# Altium PCB PCB_Prototype.PcbDoc (part 1 of 2)
Units mil, origin at the board's own origin, x right, y up, seen from the top; angles counter-clockwise.
Board outline 3779.53 x 2992.13 mil, 2 copper layers (Top Layer, Bottom Layer), stack 12.8 mil thick; 97 components, 82 nets, 386 pads, 139 vias.
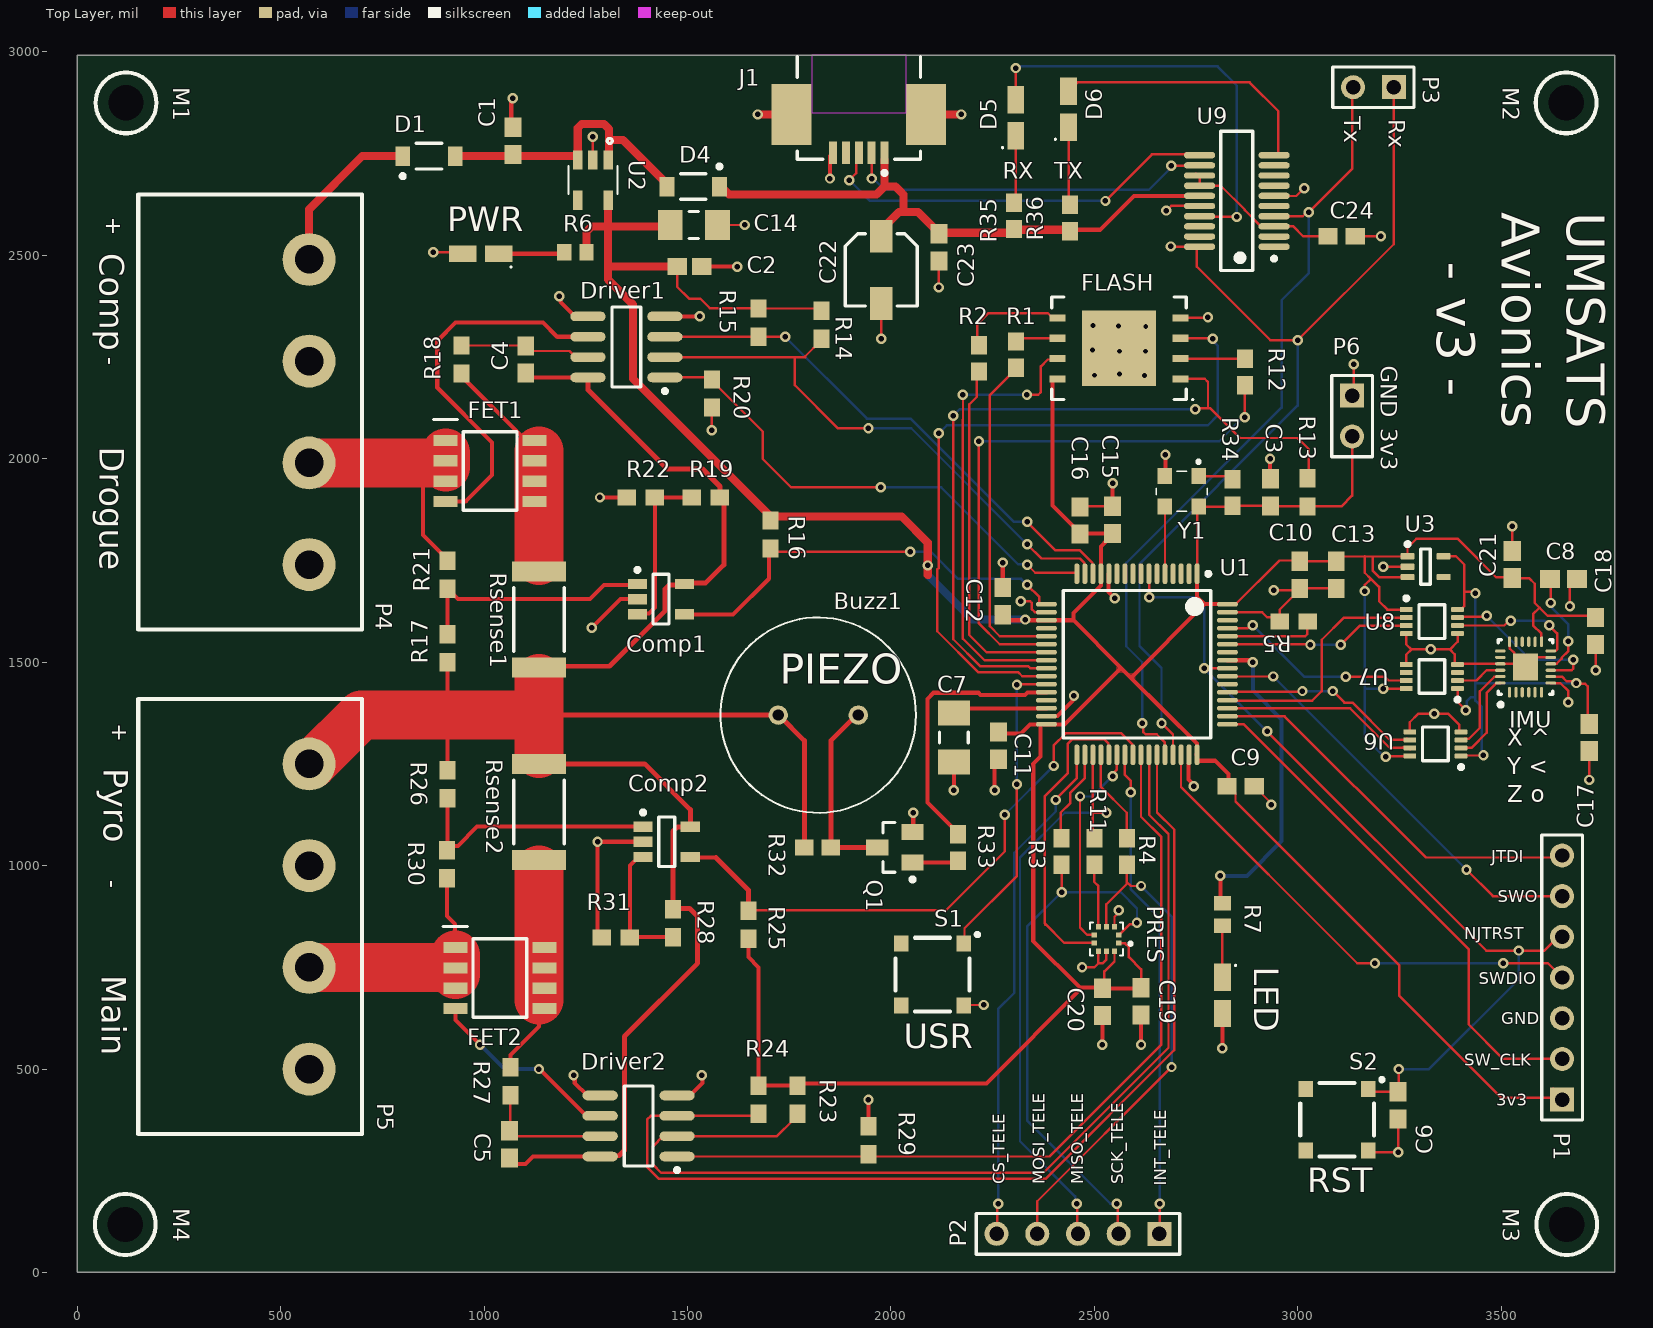
[diagram p0: Top Layer view]
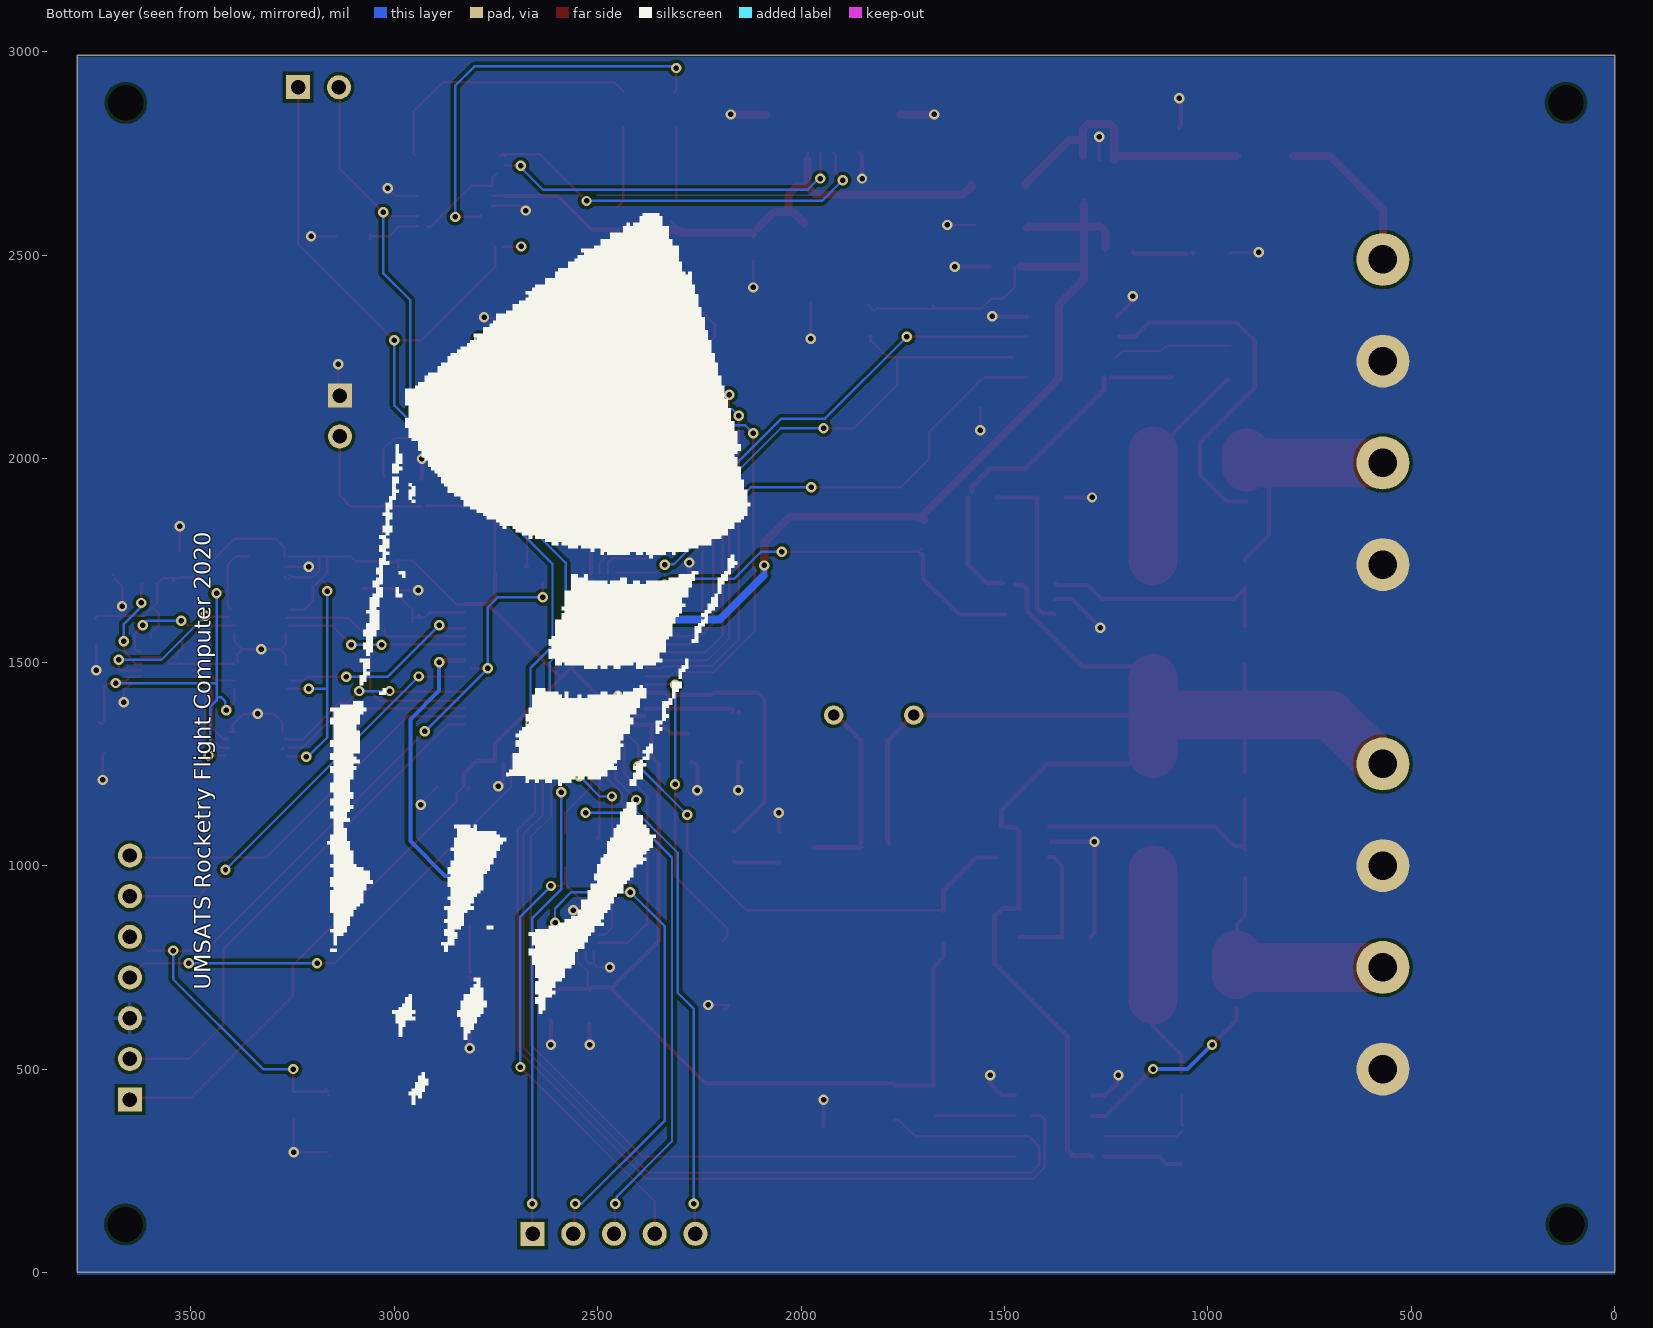
[diagram p1: Bottom Layer view, seen from below]
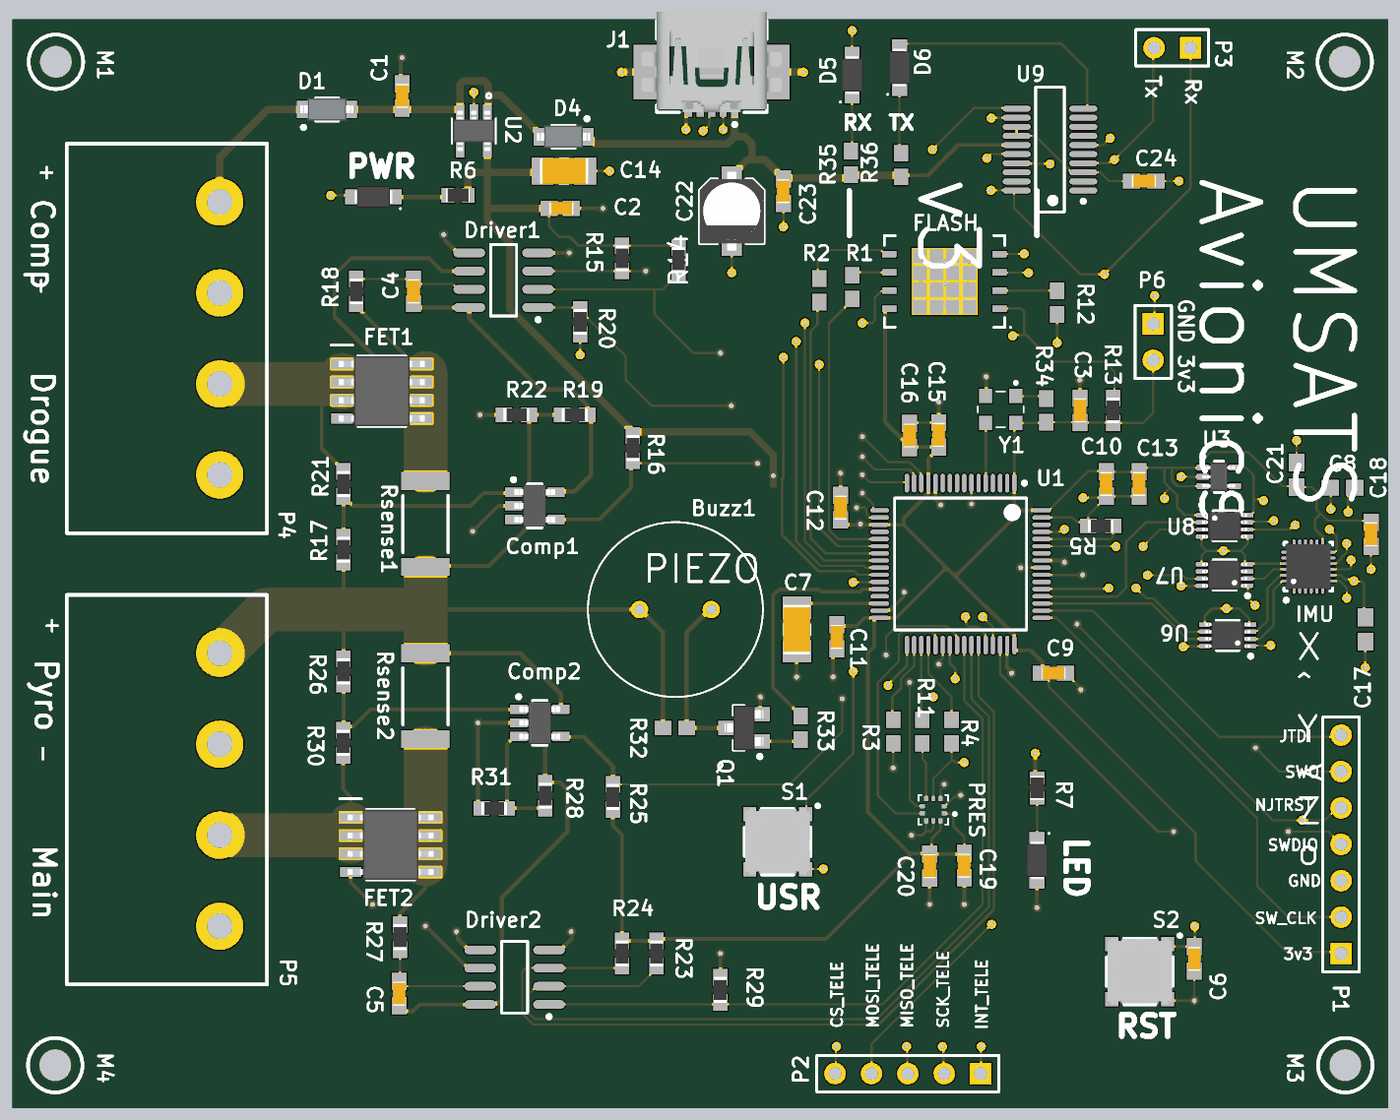
[diagram p3: 3D render of the assembled board from above, using the file's embedded part models]

## Layer stack, top to bottom
Top Solder: solder mask 0.4, Solder Resist, Dk 3.5
Top Layer: signal copper 1.4
Dielectric 1: dielectric 10, FR-4, Dk 4.2
Bottom Layer: signal copper 1.4
Bottom Solder: solder mask 0.4, Solder Resist, Dk 3.5

## Board outline
0,0 3779.53,0 3779.53,2992.13 0,2992.13

## Design rules (kind name [scope] priority, off if disabled: settings)
AcuteAngle [All] p1: minimum=8.50000000000000E+0001 checktracksonly=FALSE
Clearance [All] p1: gap=8 ignorepadtopadclearanceinfootprint=TRUE
HoleSize [All] p1: absolutevalues=TRUE maxlimit=248.03 minlimit=7.87 maxpercent=80.000 minpercent=20.000
MinimumAnnularRing [All] p1: minimumring=6
MinimumSolderMaskSliver MinimumSolderMaskSliver_Pads [InPadClass('All Pads') vs InPadClass('All Pads')] p1: minsoldermaskwidth=7.87
MinimumSolderMaskSliver MinimumSolderMaskSliver_1 [All] p2: minsoldermaskwidth=10
PolygonConnect [All] p1: connectstyle=Direct reliefconductorwidth=10 reliefentries=4 polygonreliefangle="90 Angle" airgapwidth=10
RoutingVias [All] p1: holewidth=13.5 width=25.5 viastyle="Through Hole" minholewidth=10 minwidth=24 maxholewidth=20 maxwidth=30
SilkToSolderMaskClearance [IsPad] p1: minsilkscreentomaskgap=6 clearancetoexposedcopper=TRUE
SolderMaskExpansion [All] p1: expansion=4
UnRoutedNet [All] p1: checkbadconnections=TRUE
Width Width_Recovery [(InNet('NetFET1_1') Or  InNet('NetFET1_5') OR InNet('NetC22_1'))] p1: maxlimit=120 minlimit=6 preferedwidth=10 bottomlayer_maxwidth=10 minimp=50.000000 maximp=50.000000 favimp=50.000000
Width [All] p2: maxlimit=120 minlimit=6 preferedwidth=10
Width Width_Power [(InNet('3.3V') OR InNet('GND'))] p3: maxlimit=19.68 minlimit=10 preferedwidth=19.68 minimp=50.000000 maximp=50.000000 favimp=50.000000
26 further rules are at their usual default settings.

## Classes and differential pairs
component class UART-to-USB: C22 C23 C24 D5 D6 J1 R35 R36 U9
component class Misc: Buzz1 C1 C2 C3 C20 D1 D4 FLASH Q1 R12 R13 R32 R33 R34 U2 Y1
component class Sensors: C8 C17 C18 C19 C21 IMU PRES R11 U3 U6 U7 U8
component class Recovery: C4 C5 Comp1 Comp2 Driver1 Driver2 FET1 FET2 P4 P5 R14 R15 R16 R17 R18 R19 R20 R21 R22 R23 R24 R25 R26 R27 R28 R29 R30 R31 Rsense1 Rsense2
component class Controller: C6 C7 C9 C10 C11 C12 C13 C14 C15 C16 LED M1 M2 M3 M4 P1 P2 P3 P6 PWR R1 R2 R3 R4 R5 R6 R7 S1 S2 U1

## Components (designator, comment, footprint, x,y, rotation, side; value= is the part's Value field where it differs from the comment)
Buzz1 "PS1240P02BT" *PS1240P02BT_PS1240P02BT(Primary) 1821.57,1370 r0 top
C1 "CAP 1 uF" CL10A105KB8NNNC#1 1070.87,2781.5 r90 top
C2 "CAP 1 uF" CL10A105KB8NNNC#2 1508.42,2472.44 r0 top
C3 "CAP 10 nF" 06035C104KAT4A 2933.07,1917.32 r270 top
C4 "CAP 0.1 uF" 06035C104KAT4A 1102.36,2244.09 r90 top
C5 "CAP 0.1 uF" 06035C104KAT4A 1062.99,314.96 r90 top
C6 "CAP 100 nF" 06035C104KAT4A 3246.81,410.55 r270 top
C7 "CAP 4.7uF (Low ESR)" CGA5L1X7R1E475K160AC 2155,1315 r270 top
C8 "100 nF" CAPC1608X90X35ML15T15 3653.54,1704.72 r0 top
C9 "CAP 100 nF" 06035C104KAT4A 2860,1195 r0 top
C10 "CAP 100 nF" 06035C104KAT4A 3005,1715 r270 top
C11 "CAP 100 nF" 06035C104KAT4A 2265,1295 r270 top
C12 "CAP 100 nF" 06035C104KAT4A 2275,1650 r90 top
C13 "CAP 100 nF" 06035C104KAT4A 3095,1715 r270 top
C14 "CAP 10uF" CL31A106KAHNFNE 1515.75,2574.8 r180 top value=10uF
C15 "CAP 1 uF" CL10A105KB8NNNC#1 2545,1850 r90 top
C16 "CAP 100 nF" 06035C104KAT4A 2464.57,1848.43 r90 top
C17 "100 nF" CAPC1608X90X35ML15T15 3716.54,1314.96 r90 top
C18 "CAP 100 nF" 06035C104KAT4A 3732.28,1576.77 r270 top
C19 "CAP 100 nF" 06035C104KAT4A 2615,666.54 r270 top
C20 "CAP 100 nF" 06035C104KAT4A 2520,665 r270 top
C21 "100 nF" CAPC1608X90X35ML15T15 3527.56,1740.16 r270 top
C22 "EEE-1CA100SR" PNSC-EEE1CA100SR_L 1976.38,2464.57 r270 top
C23 "CAP 100 nF" 06035C104KAT4A 2118.11,2519.68 r270 top
C24 "CAP 100 nF" 06035C104KAT4A 3108.27,2547.24 r0 top
Comp1 "TL331IDBVR" DBV0005A_M 1435,1655 r0 top
Comp2 "TL331IDBVR" DBV0005A_M 1449.06,1058.7 r0 top
D1 "MBR0520L" ON_Semi_CASE_425_0 864.67,2744.09 r0 top
D4 "MBR0520L" ON_Semi_CASE_425_0 1514.27,2669.29 r180 top
D5 "GREEN" "Vishay VLMx20 Low Current Mini SMD LED" 2307.09,2838.58 r90 top
D6 "RED" "Vishay VLMx20 Low Current Mini SMD LED" 2437.01,2859.25 r90 top
Driver1 "LTC1154HS8#PBF" LT-S8-8_N 1350,2275 r180 top
Driver2 "LTC1154HS8#PBF" LT-S8-8_N 1380,360 r180 top
FET1 "IRF7805ZTRPBF" SOIC127P600X165-8N 1015,1970 r0 top
FET2 "IRF7805ZTRPBF" SOIC127P600X165-8N 1039.06,723.7 r0 top
FLASH "MX25L25735FZ2I-10G" SON127P800X80_HS-9N 2560.83,2271.46 r180 top
IMU "ICM-20948" TDK-QFN-24_L 3560.04,1488.19 r90 top
J1 "UX60SC-MB-5ST(80)" HIRO-UX60SC-MB-5ST(80)_V 1921.26,2751.97 r180 top
LED "LED" "Vishay VLMx20 Low Current Mini SMD LED" 2814.96,681.1 r270 top
M1 "Mounting Hole M2" "Mounting Hole M2" 120,2875 r0 top
M2 "Mounting Hole M2" "Mounting Hole M2" 3660,2875 r0 top
M3 "Mounting Hole M2" "Mounting Hole M2" 3661.42,118.11 r0 top
M4 "Mounting Hole M2" "Mounting Hole M2" 118.11,118.11 r0 top
P1 "SWD/JTAG" HDR1X7 3650,425 r90 top
P2 "TELE_SPI" HDR1X5 2660,95 r180 top
P3 "UART" HDR1X2 3236.22,2913.39 r180 top
P4 "Header 5" BarrierBlock 570,1740 r180 top
P5 "Header 5" BarrierBlock 570,500 r180 top
P6 "Output" HDR1X2 3133.86,2155.12 r270 top
PRES "BMP388" *PQFN50P200X200X80-10N 2530,820 r180 top
PWR "LED" "Vishay VLMx20 Low Current Mini SMD LED" 992.13,2503.94 r180 top
Q1 "MMBT3904" FAIR-SOT23-3_V 2010,1045 r180 top
R1 "0R" CR0603-J/-000ELF 2307.09,2255.91 r270 top value=1K
R2 "0R" CR0603-J/-000ELF 2216.54,2247.05 r270 top value=1K
R3 "0R" CR0603-J/-000ELF 2420,1035 r270 top value=1K
R4 "0R" CR0603-J/-000ELF 2580,1035 r270 top value=1K
R5 "10K" RK73H1JTTD1002F 2990,1600 r180 top value=1K
R6 "750R" CRCW0603750RFKEA 1224.41,2507.87 r0 top value=1K
R7 "750R" CRCW0603750RFKEA 2815,880 r90 top value=1K
R11 "0R" CR0603-J/-000ELF 2500,1035 r270 top value=1K
R12 "0R" CR0603-J/-000ELF 2870.08,2213.58 r270 top value=1K
R13 "10K" RK73H1JTTD1002F 3023.62,1917.32 r270 top value=1K
R14 "10K" RK73H1JTTD1002F 1830,2330 r90 top value=1K
R15 "51k" RK73H1JTTD1002F 1675,2335 r90 top value=1K
R16 "10K" RK73H1JTTD1002F 1704.72,1813.98 r90 top value=1K
R17 "10k" RK73H1JTTD1002F 910,1534.45 r270 top value=1K
R18 "10k" RK73H1JTTD1002F 944.88,2244.09 r90 top value=1K
R19 "10K" RK73H1JTTD1002F 1545,1905 r0 top value=1K
R20 "10K" RK73H1JTTD1002F 1560,2160.55 r90 top value=1K
R21 "10k" RK73H1JTTD1002F 910,1715 r270 top value=1K
R22 "12k" RK73H1JTTD1002F 1385,1905 r0 top value=1K
R23 "10K" RK73H1JTTD1002F 1770,425 r90 top value=1K
R24 "51k" RK73H1JTTD1002F 1675,425 r90 top value=1K
R25 "10K" RK73H1JTTD1002F 1650,855 r270 top value=1K
R26 "10k" RK73H1JTTD1002F 910,1200 r90 top value=1K
R27 "10k" RK73H1JTTD1002F 1065,470 r270 top value=1K
R28 "10K" RK73H1JTTD1002F 1464.06,858.7 r90 top value=1K
R29 "10K" RK73H1JTTD1002F 1945,325 r270 top value=1K
R30 "10k" RK73H1JTTD1002F 909.06,1003.7 r90 top value=1K
R31 "12k" RK73H1JTTD1002F 1324.06,823.7 r0 top value=1K
R32 "1k" CR0603-J/-000ELF 1820,1045 r180 top value=1K
R33 "330" CR0603-J/-000ELF 2165,1045 r270 top value=1K
R34 "0R" CR0603-J/-000ELF 2840,1917.52 r270 top value=1K
R35 "1K" CR0603-J/-000ELF 2303.15,2597.44 r270 top
R36 "1K" CR0603-J/-000ELF 2440.94,2591.54 r270 top
Rsense1 "0.033 1% 2512(6432)" RESC2512(6432)_N 1135,1605 r270 top value="8660000.00 Ohm"
Rsense2 "0.033 1% 2512(6432)" RESC2512(6432)_N 1135,1131.89 r90 top value="8660000.00 Ohm"
S1 "SW-PB" PTS530GG065SMTRLFS 2102.36,732.28 r270 top
S2 "SW-PB" PTS530GG065SMTRLFS 3096.81,375.55 r270 top
U1 "STM32F401RET6" STM-LQFP64_N 2605,1495 r270 top
U2 "TLV75533PDBVR" SOT95P280X145-5N 1267.72,2685.04 r270 top
U3 "TLV70018DCKR" DCK0005A_N 3314.29,1735 r0 top
U6 "SN74LVC2T45DCTR" DCU0008A_N 3338.58,1299.21 r180 top
U7 "SN74LVC2T45DCTR" DCU0008A_N 3330,1465 r180 top
U8 "SN74LVC2T45DCTR" DCU0008A_N 3330,1600 r0 top
U9 "FT231XS-R" SSOP-20_L 2850.39,2633.86 r180 top
Y1 "ASEMB-8.000MHZ-XY-T" ASEMB 2715,1920 r180 top

## Footprints (in the part's own frame and the unit in brackets; to place one, negate y for a bottom-side part, rotate by r counter-clockwise, add the part's x,y. Pads: shape width x height; smd on the part's side, far side on the other; paste and mask are expansions set on the pad)
06035C104KAT4A [mm] "Low Density IPC Chip Capacitor 100nF 0603 50V 06035C104KAT4A"
  rect 1.2x1.05 smd: 1(-0.85,0) 2(0.85,0)
  body extent -0.85,-0.45 0.85,0.45, height 0.9
*PQFN50P200X200X80-10N [mm]
  rect 0.35x0.3 smd mask+0.05: 1(-0.765,0.25) 2(-0.765,-0.25) 6(0.765,-0.25) 7(0.765,0.25)
  rect 0.3x0.35 smd mask+0.05: 3(-0.5,-0.765) 4(0,-0.765) 5(0.5,-0.765) 8(0.5,0.765) 9(0,0.765) 10(-0.5,0.765)
  silkscreen extent -1.6,-1.03 1.03,1.03
*PS1240P02BT_PS1240P02BT(Primary) [mm]
  round 1.208 hole 0.7: P$1(-2.5,0) P$2(2.5,0)
  silkscreen extent -6.1,-6.1 6.1,6.1
ASEMB [mm]
  rect 0.9x1 smd: 1(-1.05,-0.95) 2(1.05,-0.95) 3(1.05,0.95) 4(-1.05,0.95)
  silkscreen extent -1.6,-1.95 1.6,1.25
BarrierBlock [mil]
  round 130 hole 70: 1(0,0) 2(0,-250) 3(0,-500) 4(0,-750)
  silkscreen extent -130,-910 420,160
CAPC1608X90X35ML15T15 [mm] "Chip Capacitor, 2-Leads, Body 1.60x0.81mm, IPC Low Density"
  rect 1.25x1.1 smd: 1(-0.85,0) 2(0.85,0)
  body extent -0.88,-0.48 0.87,0.48, height 0.9
CGA5L1X7R1E475K160AC [mm] "Low-Density IPC Chip Capacitor 4.7uF 25V 1206"
  rect 1.55x2 smd: 1(-1.525,0) 2(1.525,0)
  silkscreen extent -0.35,-0.9 0.35,0.9, body extent -1.75,-0.95 1.75,0.95, height 1.9
CL10A105KB8NNNC#1 [mm] "Low-Density IPC Chip Capacitor 1uF 50V 0603"
  rect 1.2x1.05 smd: 1(-0.85,0) 2(0.85,0)
  body extent -0.85,-0.45 0.85,0.45, height 0.9
CL10A105KB8NNNC#2 [mm] "Low-Density IPC Chip Capacitor 1uF 50V 0603"
  rect 1.2x1.05 smd: 1(-0.85,0) 2(0.686,0)
  body extent -0.85,-0.45 0.85,0.45, height 0.9
CL31A106KAHNFNE [mm] "Low-Density IPC Chip Capacitor 10uF 1206 CL31A106KAHNFNE"
  rect 1.55x1.9 smd: 1(-1.475,0) 2(1.475,0)
  silkscreen extent -0.3,-0.85 0.3,0.85, body extent -1.7,-0.9 1.7,0.9, height 1.8
CR0603-J/-000ELF [mm] "0R 0603 Resistor, IPCLow Density"
  rect 1.15x1 smd: 1(-0.825,0) 2(0.825,0)
  body extent -0.85,-0.45 0.85,0.45, height 0.55
CRCW0603750RFKEA [mm] "750R 0603 Resistor, IPC Low Density"
  rect 0.9x1.05 smd: 1(-0.7,0) 2(0.7,0)
  body extent -0.82,-0.48 0.82,0.48, height 0.5
DBV0005A_M [mm] "SOT23, 5-Leads, Body 3.05x1.75mm, Pitch 0.95mm, IPC Low Density"
  rect 1.2x0.65 smd: 1(-1.475,0.95) 2(-1.475,0) 3(-1.475,-0.95) 4(1.475,-0.95) 5(1.475,0.95)
  silkscreen extent -1.6,-1.55 0.5,1.95, body extent -1.42,-1.46 1.42,1.46, height 1.08
DCK0005A_N [mm] "SOT23, 5-Leads, Body 2.15x1.4mm, Pitch 0.65mm, IPC Medium Density"
  rrect25% 0.85x0.4 smd: 1(-1.125,0.65) 2(-1.125,0) 3(-1.125,-0.65) 4(1.125,-0.65) 5(1.125,0.65)
  silkscreen extent -1.25,-1.1 0.3,1.52, body extent -1.14,-1 1.14,1, height 0.94
DCU0008A_N [mm] "SOP, 8-Leads, Body 2.4x2.1mm, Pitch 0.5mm, IPC Medium Density"
  rrect33% 0.8x0.3 smd: 1(-1.6,0.75) 2(-1.6,0.25) 3(-1.6,-0.25) 4(-1.6,-0.75) 5(1.6,-0.75) 6(1.6,-0.25) 7(1.6,0.25) 8(1.6,0.75)
  silkscreen extent -1.73,-1.05 0.8,1.57, body extent -1.56,-1 1.56,1, height 0.9
FAIR-SOT23-3_V [mm] "SOT23, 3-Leads, Body 3.12x1.5mm, Pitch 0.95mm"
  rect 1.4x1 smd: 1(-1.1,0.95) 2(-1.1,-0.95) 3(1.1,0)
  silkscreen extent -1.23,-1.55 0.75,2.12, body extent -1.35,-1.56 1.35,1.56, height 1.2
HDR1X2 [mm] "Connector; Header; 2 Position"
  rect 1.5x1.5 hole 0.9: 1(0,0)
  round 1.5 hole 0.9: 2(2.54,0)
  silkscreen extent -1.27,-1.27 3.81,1.27
HDR1X5 [mm] "Connector; Header; 5 Position"
  rect 1.5x1.5 hole 0.9: 1(0,0)
  round 1.5 hole 0.9: 2(2.54,0) 3(5.08,0) 4(7.62,0) 5(10.16,0)
  silkscreen extent -1.27,-1.27 11.43,1.27
HDR1X7 [mm] "Connector; Header; 7 Position"
  rect 1.5x1.5 hole 0.9: 1(0,0)
  round 1.5 hole 0.9: 2(2.54,0) 3(5.08,0) 4(7.62,0) 5(10.16,0) 6(12.7,0) 7(15.24,0)
  silkscreen extent -1.27,-1.27 16.51,1.27
HIRO-UX60SC-MB-5ST(80)_V [mm] "SMD, 5-Leads, Body 7.7x7mm, Pitch 0.8mm"
  rect 0.5x1.4 smd: 1(-1.6,0) 2(-0.8,0) 3(0,0) 4(0.8,0) 5(1.6,0)
  rect 2.5x3.8 smd: 6(-4.2,-2.4) 7(4.2,-2.4)
  Top Layer keep-out region: -2.95,-6.1 2.95,-6.1 2.95,-2.5 -2.95,-2.5
  silkscreen extent -3.85,-6 3.85,1.37, body extent -4.9,-6.62 4.9,0.38, height 3.95
LT-S8-8_N [mm] "SOIC, 8-Leads, Body 5x4mm, Pitch 1.27mm, IPC Medium Density"
  oval 2.2x0.6 smd: 1(-2.4,1.905) 2(-2.4,0.635) 3(-2.4,-0.635) 4(-2.4,-1.905) 5(2.4,-1.905) 6(2.4,-0.635) 7(2.4,0.635) 8(2.4,1.905)
  silkscreen extent -2.53,-2.5 0.9,2.88, body extent -2,-2.5 2,2.5, height 1.76
"Mounting Hole M2" [mil]
  round 60 hole 86.61: 3(0,0)
  silkscreen extent -75,-75 75,75
ON_Semi_CASE_425_0 [mm]
  rect 0.915x1.22 smd paste+0 mask+0.076: 1(-1.638,0) 2(1.638,0)
  silkscreen extent -1.76,-1.37 0.8,0.8, body extent -2.19,-1 2.19,1, height 0.25
PNSC-EEE1CA100SR_L [mm] "Aluminum Electrolytic Capacitor, 2-Leads, Body 4.5x4.5mm, IPC High Density"
  rect 2.05x1.4 smd: 1(-2.1,0) 2(2.1,0)
  silkscreen extent -2.25,-2.25 2.25,2.25, body extent -2.75,-2.25 2.75,2.25, height 5.5
PTS530GG065SMTRLFS [mm] "Tactile Switch"
  rect 1x0.9 smd: 1(-1.925,1.95) 2(1.925,1.95) 3(-1.925,-1.95) 4(1.925,-1.95)
  silkscreen extent -2.6,-2.3 2.3,2.9, body extent -2.35,-2.25 2.3,2.26, height 0.64
RESC2512(6432)_N [mm] "Chip Resistor, Body 6.4x3.2mm, IPC Medium Density"
  rect 1.25x3.35 smd: 1(-3,0) 2(3,0)
  silkscreen extent -2,-1.57 2,1.58, body extent -3.25,-1.7 3.25,1.7, height 0.75
RK73H1JTTD1002F [mm] "10k 0603 Resistor IPC Low Density"
  rect 1.15x1 smd: 1(-0.875,0) 2(0.875,0)
  body extent -0.9,-0.45 0.9,0.45, height 0.55
SOIC127P600X165-8N [mm]
  rect 1.5x0.7 smd: 1(-2.775,1.905) 2(-2.775,0.635) 3(-2.775,-0.635) 4(-2.775,-1.905) 5(2.775,-1.905) 6(2.775,-0.635) 7(2.775,0.635) 8(2.775,1.905)
  silkscreen extent -3.53,-2.45 1.67,3.21, body extent -3,-2.45 3,2.45, height 1.65
SON127P800X80_HS-9N [mm] "SON, 8-Leads, Body 6.00x8.00mm, Pitch 1.27mm, Thermal Pad 4.70x4.60mm, IPC Medium Density"
  rect 1x0.45 smd: 1(-3.845,1.905) 2(-3.845,0.635) 3(-3.845,-0.635) 4(-3.845,-1.905) 5(3.845,-1.905) 6(3.845,-0.635) 7(3.845,0.635) 8(3.845,1.905)
  rect 4.6x4.7 smd paste-2.3: 9(0,0)
  silkscreen extent -4.65,-3.2 4.2,3.25, body extent -4.05,-3.05 4.05,3.05, height 0.8
SOT95P280X145-5N [mm]
  rect 1.21x0.59 smd: 1(-1.255,0.95) 2(-1.255,0) 3(-1.255,-0.95) 4(1.255,-0.95) 5(1.255,0.95)
  silkscreen extent -2.61,-1.53 0.88,1.53, body extent -1.4,-1.45 1.4,1.45, height 1.45
SSOP-20_L [mm] "SOP, 20-Leads, Body 8.6x3.9mm, Pitch 0.635mm, IPC High Density"
  oval 1.95x0.4 smd: 1(-2.325,2.857) 2(-2.325,2.222) 3(-2.325,1.587) 4(-2.325,0.952) 5(-2.325,0.317) 6(-2.325,-0.318) 7(-2.325,-0.953) 8(-2.325,-1.588) 9(-2.325,-2.223) 10(-2.325,-2.858) 11(2.325,-2.857) 12(2.325,-2.222) 13(2.325,-1.587) 14(2.325,-0.952) 15(2.325,-0.317) 16(2.325,0.318) 17(2.325,0.953) 18(2.325,1.588) 19(2.325,2.223) 20(2.325,2.858)
  silkscreen extent -2.45,-4.35 1,4.35, body extent -1.99,-4.37 1.99,4.37, height 1.76
STM-LQFP64_N [mm] "QFP, 64-Leads, Body 10x10mm, Pitch 0.5mm, IPC Medium Density"
  oval 1.3x0.3 smd: 1(-5.65,3.75) 2(-5.65,3.25) 3(-5.65,2.75) 4(-5.65,2.25) 5(-5.65,1.75) 6(-5.65,1.25) 7(-5.65,0.75) 8(-5.65,0.25) 9(-5.65,-0.25) 10(-5.65,-0.75) 11(-5.65,-1.25) 12(-5.65,-1.75) 13(-5.65,-2.25) 14(-5.65,-2.75) 15(-5.65,-3.25) 16(-5.65,-3.75) 33(5.65,-3.75) 34(5.65,-3.25) 35(5.65,-2.75) 36(5.65,-2.25) 37(5.65,-1.75) 38(5.65,-1.25) 39(5.65,-0.75) 40(5.65,-0.25) 41(5.65,0.25) 42(5.65,0.75) 43(5.65,1.25) 44(5.65,1.75) 45(5.65,2.25) 46(5.65,2.75) 47(5.65,3.25) 48(5.65,3.75)
  oval 0.3x1.3 smd: 17(-3.75,-5.65) 18(-3.25,-5.65) 19(-2.75,-5.65) 20(-2.25,-5.65) 21(-1.75,-5.65) 22(-1.25,-5.65) 23(-0.75,-5.65) 24(-0.25,-5.65) 25(0.25,-5.65) 26(0.75,-5.65) 27(1.25,-5.65) 28(1.75,-5.65) 29(2.25,-5.65) 30(2.75,-5.65) 31(3.25,-5.65) 32(3.75,-5.65) 49(3.75,5.65) 50(3.25,5.65) 51(2.75,5.65) 52(2.25,5.65) 53(1.75,5.65) 54(1.25,5.65) 55(0.75,5.65) 56(0.25,5.65) 57(-0.25,5.65) 58(-0.75,5.65) 59(-1.25,5.65) 60(-1.75,5.65) 61(-2.25,5.65) 62(-2.75,5.65) 63(-3.25,5.65) 64(-3.75,5.65)
  silkscreen extent -5.77,-4.6 4.6,4.6, body extent -5,-5 5,5, height 1.6
TDK-QFN-24_L [mm] "QFN, 24-Leads, Body 3.10x3.10mm, Pitch 0.40mm, Thermal Pad 1.70x1.54mm, IPC High Density"
  oval 0.65x0.2 smd: 1(-1.575,1) 2(-1.575,0.6) 3(-1.575,0.2) 4(-1.575,-0.2) 5(-1.575,-0.6) 6(-1.575,-1) 13(1.575,-1) 14(1.575,-0.6) 15(1.575,-0.2) 16(1.575,0.2) 17(1.575,0.6) 18(1.575,1)
  oval 0.2x0.65 smd: 7(-1,-1.575) 8(-0.6,-1.575) 9(-0.2,-1.575) 10(0.2,-1.575) 11(0.6,-1.575) 12(1,-1.575) 19(1,1.575) 20(0.6,1.575) 21(0.2,1.575) 22(-0.2,1.575) 23(-0.6,1.575) 24(-1,1.575)
  rect 1.7x1.54 smd: 25(0,0)
  silkscreen extent -2.47,-1.7 1.7,1.7, body extent -1.55,-1.55 1.55,1.55, height 1.05
"Vishay VLMx20 Low Current Mini SMD LED" [mm] "Molded Diode, 2-Leads, Body 2.20x1.40mm, IPC Low Density"
  rect 1.7x1.05 smd: 1(-1.125,0) 2(1.125,0)
  silkscreen extent -1.92,0.77 -1.83,0.87, body extent -1.37,-0.75 1.37,0.75, height 1.4

## Part data
Buzz1: "Audio Buzzer Piezo 30Vo-p 3Vo-p 70dBA Pin Through Hole T/R", Package="2020 TDK", Supplier Part Number 1=445-2525-1-ND, Availability=Unavailable, MF=TDK, MP=PS1240P02BT, Price=None, SnapEDA_Link=https://www.snapeda.com/parts/PS1240P02BT/TDK-Lambda%20Americas%20Inc/view-part/?ref=snap, Supplier 1=Digi-Key
C1 C2 C15: library part Cap, "Capacitor", Supplier Part Number 1=1276-1860-1-ND, LatestRevisionDate=17-Jul-2002, LatestRevisionNote="Re-released for DXP Platform.", Published=8-Jun-2000, Publisher="Altium Limited", Supplier 1=Digi-Key
C3: library part Cap, "Capacitor", Supplier Part Number 1=399-1091-1-ND, LatestRevisionDate=17-Jul-2002, LatestRevisionNote="Re-released for DXP Platform.", Published=8-Jun-2000, Publisher="Altium Limited", Supplier 1=Digi-Key
C4 C5 C6 C9 C10 C11 C12 C13 C16 C18 C19 C20 C23 C24: library part Cap, "Capacitor", Supplier Part Number 1=478-10346-1-ND, LatestRevisionDate=17-Jul-2002, LatestRevisionNote="Re-released for DXP Platform.", Published=8-Jun-2000, Publisher="Altium Limited", Supplier 1=Digi-Key
C7: library part Cap, "Capacitor", Supplier Part Number 1=445-5706-1-ND, LatestRevisionDate=17-Jul-2002, LatestRevisionNote="Re-released for DXP Platform.", Published=8-Jun-2000, Publisher="Altium Limited", Supplier 1=Digi-Key
C8 C17 C21: library part CMP-2006-04388-1, Manufacturer="AVX Interconnect / Elco", Part Number=06035C104K4Z2A, Supplier Part Number 1=478-10346-1-ND, Supplier 1=Digi-Key
C14: library part Cap, "Capacitor", Supplier Part Number 1=1276-3038-1-ND, LatestRevisionDate=17-Jul-2002, LatestRevisionNote="Re-released for DXP Platform.", PackageDescription="Radial Cap, Thru-Hole; 2 Leads; 0.3 in Pin Spacing", PackageReference=RAD-0.3, Published=8-Jun-2000, Publisher="Altium Limited", Supplier 1=Digi-Key
C22: library part CMP-2000-06199-1, "Aluminum Electrolytic Capacitor, 10 uF, +/- 20%, -40 to 85 degC, 2-Pin SMD, RoHS, Tape and Reel", AC Ripple Current=28mA, AE Capacitor Case=RadialCan-SMD, Capacitance=10µF, Capacitance Tolerance=±20%, Capacitor Mounting=SMD, Leakage Current=3µA, Life Time @ Temperature=2000hours@85°C, Manufacturer=Panasonic, Operating Life Temperature=85°C, Operating life Time=2000h, Operating Temperature Min=-40°C, Operating Temperature Range=-40°Cto+85°C, Package / Case=B, Package Description="2-Pin Surface Mount Device, Body 4.5 x 4.5 mm", Package Reference=EEE1CA100SR, Power Factor=0.16, Power Factor Frequency=120Hz, Supplier Part Number 1=PCE3878CT-ND, Tolerance +=20%, Voltage Rating=16V, Capacitance Tolerance ±=±20%, Capacitor Case Style=RadialCan-SMD, Capacitor Terminals=SMD, Datasheet URL=https://datasheet.ciiva.com/19458/1355487-19458346.pdf, Datasheet Version=04/2005, Diameter=4mm, External Depth=4.3mm, External Length / Height=5.4mm, External Width=4.3mm, Height=5.4mm, Lead Cross-section Width=0.65mm, Lead Length=1.8mm, Lead Spacing=1mm, Lifetime @ Temperature=2000hours@85°C, Manufacturer URL=http://www.panasonic.com/, Mounting Technology=SurfaceMount, No. of Pins=2, Operating Lifetime=2000h, Operating Temperature Max=85°C, Packaging=CutTape, Product Range=PANASONIC-SSeries, Ripple Current AC=28mA, Ripple Current Frequency=120Hz, Ripple Current Temperature=85°C, Series=VS, Supplier 1=Digi-Key, SVHC=NoSVHC(16-Dec-2013), Tape Width=12mm, Tolerance -=20%, Voltage Rating V DC=16V
Comp1 Comp2: library part CMP-2000-04959-1, "Single Differential Comparator, 2 to 36 V, -40 to 125 degC, 5-Pin SOT-23, Green (RoHS & no Sb/Br), Tape and Reel", Manufacturer=TexasInstruments, Maximum Dual Supply Voltage=±18V, Maximum Single Supply Voltage=36V, Minimum Dual Supply Voltage=±1V, Minimum Single Supply Voltage=2V, Operating Temperature=-40to85degC, Package=5SOT-23, Package Description="5-Pin Small Outline Transistor, Body 2.9 x 1.6 mm, Pitch 0.95 mm", Package Reference=DBV5, Package Version="4073253-4/N, 12/2014", Supplier Part Number 1=296-37702-1-ND, Typical Voltage Gain=106.02dB, Category=Comparator, Datasheet URL=http://www.ti.com/general/docs/lit/getliterature.tsp?genericPartNumber=TL331&fileType=pdf, Datasheet Version="Rev. G, 02/2016", Manufacturer URL=http://www.ti.com/, Mounting=SurfaceMount, Number of Channels per Chip=1, Output Type=OpenCollector, Package URL=http://www.ti.com/lit/ml/mpds018l/mpds018l.pdf, Packaging=Tape&Reel, Rad Hard=No, Rail to Rail=No, Strobe Capability=No, Supplier 1=Digi-Key, Typical Response Time=1.3us
D1 D4: "Schottky Diode", Average Rectified Current=500mA, Capacitance=4pF, Current Rating=500A, Forward Voltage=385mV, Manufacturer="ON Semiconductor / Fairchild", Max Forward Surge Current (Ifsm)=5.5A, Max Operating Temperature=125°C, Max Repetitive Reverse Voltage (Vrrm)=20V, Max Reverse Leakage Current=250uA, Min Operating Temperature=-65°C, Package Quantity=3000, Power Dissipation=400mW, Supplier Part Number 1=MBR0520LCT-ND, ComponentLink1Description=http://www.farnell.com/datasheets/2304093.pdf?src-supplier=Farnell, ComponentLink1URL=http://www.farnell.com/datasheets/2304093.pdf?src-supplier=Farnell, ComponentLink2Description=http://www.mouser.com/ds/2/149/MBR0520L-67539.pdf?src-supplier=Mouser, ComponentLink2URL=http://www.mouser.com/ds/2/149/MBR0520L-67539.pdf?src-supplier=Mouser, ComponentLink3Description=https://www.fairchildsemi.com/datasheets/MB/MBR0520L.pdf?src-supplier=Digi-Key, ComponentLink3URL=https://www.fairchildsemi.com/datasheets/MB/MBR0520L.pdf?src-supplier=Digi-Key, ComponentLink4Description=https://www.fairchildsemi.com/datasheets/MB/MBR0520L.pdf?src-supplier=Avnet, ComponentLink4URL=https://www.fairchildsemi.com/datasheets/MB/MBR0520L.pdf?src-supplier=Avnet, ComponentLink5Description=http://www.fairchildsemi.com/ds/MB/MBR0520L.pdf?src-supplier=Avnet+Europe, ComponentLink5URL=http://www.fairchildsemi.com/ds/MB/MBR0520L.pdf?src-supplier=Avnet+Europe, ComponentLink6Description=http://www.jameco.com/Jameco/Products/ProdDS/871594.pdf?src-supplier=Jameco, ComponentLink6URL=http://www.jameco.com/Jameco/Products/ProdDS/871594.pdf?src-supplier=Jameco, ComponentLink7Description=http://www.fairchildsemi.com/ds/MB/MBR0520L.pdf?src-supplier=Future+Electronics, ComponentLink7URL=http://www.fairchildsemi.com/ds/MB/MBR0520L.pdf?src-supplier=Future+Electronics, ComponentLink8Description=http://www.farnell.com/datasheets/48015.pdf?src-supplier=Element14, ComponentLink8URL=http://www.farnell.com/datasheets/48015.pdf?src-supplier=Element14, Element Configuration=Single, Forward Current=500mA, Height=1.03mm, Lead Free="Lead Free", Length=2.7mm, Manufacturer Part Number=MBR0520L, Max Reverse Voltage (DC)=20V, Max Surge Current=5.5A, Mount="Surface Mount", Number of Pins=2, Output Current=500mA, Packaging="Tape and Reel", Peak Non-Repetitive Surge Current=5.5A, Peak Reverse Current=250uA, Polarity=Standard, Radiation Hardening=No, REACH SVHC="No SVHC", RoHS=Yes, Supplier 1=Digi-Key, Voltage Rating (DC)=20V, Weight=0.03g, Width=1.6mm
D5: library part LED2, "Typical RED, GREEN, YELLOW, AMBER GaAs LED", Supplier Part Number 1=67-2282-1-ND, LatestRevisionDate=17-Jul-2002, LatestRevisionNote="Re-released for DXP Platform.", PackageDescription="SM LED; 2 Flat Leads", PackageReference=3.2X1.6X1.1, PackageVersion=Feb-2002, Published=8-Jun-2000, Publisher="Altium Limited", Supplier 1=Digi-Key
D6 LED PWR: library part LED2, "Typical RED, GREEN, YELLOW, AMBER GaAs LED", Supplier Part Number 1=VLMS20J2L1-GS08CT-ND, LatestRevisionDate=17-Jul-2002, LatestRevisionNote="Re-released for DXP Platform.", PackageDescription="SM LED; 2 Flat Leads", PackageReference=3.2X1.6X1.1, PackageVersion=Feb-2002, Published=8-Jun-2000, Publisher="Altium Limited", Supplier 1=Digi-Key
Driver1 Driver2: library part CMP-0479-00484-1, "High-Side Micropower MOSFET Driver, 22 V Vin MAX, 8-pin SOIC (S8-8), -40 to 150 degC, Pb-Free", Manufacturer="Linear Technology", Supplier Part Number 1=LTC1154HS8#PBF-ND, ComponentLink1Description="Manufacturer URL", ComponentLink1URL=http://www.linear.com/, ComponentLink2Description=Datasheet, ComponentLink2URL=http://cds.linear.com/docs/en/datasheet/1154fb.pdf, ComponentLink3Description="Package Specification", ComponentLink3URL=http://cds.linear.com/docs/en/packaging/05081610_G_SO8.pdf, DatasheetVersion="Rev. B", Mounting Technology="Surface Mount", PackageDescription="8-Pin Plastic Small Outline (Narrow .150 Inch), Body 4.9 x 3.9 mm, Pitch 1.27 mm", PackageReference=S8-8, PackageVersion="Rev. G, 03/2012", PartNumber=LTC1154HS8#PBF, RoHS=TRUE, Supplier 1=Digi-Key
FET1 FET2: library part RSS100N03FRATB, "MOSFET (N-Channel)", Manufacturer_Name="ROHM Semiconductor", Mouser Part Number=755-RSS100N03FRATB, Supplier Part Number 1=IRF7805ZPBFCT-ND, Datasheet Link=https://componentsearchengine.com/Datasheets/1/RSS100N03FRATB.pdf, Height=1.65mm, Manufacturer_Part_Number=RSS100N03FRATB, Mouser Price/Stock=https://www.mouser.com/Search/Refine.aspx?Keyword=755-RSS100N03FRATB, Supplier 1=Digi-Key
FLASH: library part S25FL064P, "MX25L25735F 256 Mb Flash Memory", Supplier Part Number 1=1092-1152-ND, Supplier 1=Digi-Key
IMU: library part CMP-2000-07532-1, "World’s Lowest Power 9-Axis MEMS MotionTracking(TM) Device, 1.71 to 3.6 V, -40 to 85 degC, 24-Pin QFN, RoHS, Tape and Reel", Manufacturer=TDK, Package Description="24-Pin Quad Flat No-lead Package, Body 3 x 3 mm, Pitch 0.4 mm", Package Reference=QFN-24, Supplier Part Number 1=1428-1123-1-ND, Datasheet URL=https://www.invensense.com/wp-content/uploads/2016/06/DS-000189-ICM-20948-v1.3.pdf, Datasheet Version="Rev. 1.3, 06/2017", Manufacturer URL=http://www.tdk.com/, Mounting Technology=SurfaceMount, Supplier 1=Digi-Key
J1: library part CMP-2000-07376-1, "Mini-B Connector, SMT Mount Receptacle Meeting Requirement of USB 2.0 Standard, 5 V, 1 A, -30 to 75 degC, 5-Pin SMD, RoHS, Tape and Reel", Current Rating (Max)=1A, Manufacturer="Hirose Electric", Operating Temperature Max Deg. C=75C, Operating Temperature Min Deg. C=-30C, Operating Temp Range=-30Cto75C, Package Description="5-Pin Surface Mount Device, Body 7.7 x 7 mm, Pitch 0.8 mm", Supplier Part Number 1=H11671CT-ND, Voltage Rating Max=5VAC, Body Orientation=RightAngle, Contact Material=CopperAlloy, Contact Plating=Gold, Datasheet URL=https://datasheet.ciiva.com/4598/e24000153-34949-4598883.pdf, Datasheet Version=04/2008, DELETED=Compliant, Gender=RCP, Housing Material=Synthetic, Manufacturer URL=https://www.hirose.com, Mounting Style=ThroughHole, Mounting Technology=SurfaceMount, Number of Contacts=5POS, Number of Ports=1Port, Number of Terminals=5, Package Reference=UX60SC-MB-5ST(80), Packaging=TapeandReel, Pitch (mm)=0.8mm, Product Depth (mm)=7mm, Product Diameter (mm)=NotRequiredmm, Product Height (mm)=3.95mm, Product Length (mm)=7.7mm, Supplier 1=Digi-Key, Termination Method=Solder, Type=Mini-USB
P1: library part "Header 7", "Header, 7-Pin", Supplier Part Number 1=S7040-ND, LatestRevisionDate=17-Jul-2002, LatestRevisionNote="Re-released for DXP Platform.", Publisher="Altium Limited", Supplier 1=Digi-Key
P2: library part "Header 5", "Header, 5-Pin", Supplier Part Number 1=S7038-ND, LatestRevisionDate=17-Jul-2002, LatestRevisionNote="Re-released for DXP Platform.", Publisher="Altium Limited", Supplier 1=Digi-Key
P3 P6: library part "Header 2", "Header, 2-Pin", Supplier Part Number 1=S7035-ND, LatestRevisionDate=17-Jul-2002, LatestRevisionNote="Re-released for DXP Platform.", Publisher="Altium Limited", Supplier 1=Digi-Key
P4 P5: library part "Header 4", "Header, 4-Pin", Supplier Part Number 1=A112373-ND, LatestRevisionDate=17-Jul-2002, LatestRevisionNote="Re-released for DXP Platform.", Publisher="Altium Limited", Supplier 1=Digi-Key
PRES: "P-Sensor SPI I2C 1, 25 Bar SMD", Package="WFLGA-10 Bosch Tools", Supplier Part Number 1=828-1079-1-ND, Availability=Unavailable, MF="Bosch Sensortec", MP=BMP388, Price=None, SnapEDA_Link=https://www.snapeda.com/parts/BMP388/Bosch%20Sensortec/view-part/?ref=snap, Supplier 1=Digi-Key
Q1: library part CMP-1670-00008-1, "NPN General Purpose Amplifier, 40 V, 0.2 A, -55 to 150 degC, 3-Pin SOT23, RoHS, Tape and Reel", Capacitance="1.8E-11 f", Frequency="12.288 MHz", Frequency Tolerance=30ppm, Load Capacitance="18 pF", Max Operating Temperature=70degC, Min Operating Temperature=-20degC, Package Quantity=1000, Supplier Part Number 1=MMBT3904TPMSCT-ND, ComponentLink1Description="Manufacturer URL", ComponentLink1URL=https://www.fairchildsemi.com/, ComponentLink2Description=Datasheet, ComponentLink2URL=https://www.fairchildsemi.com/datasheets/MM/MMBT3904.pdf, ComponentLink3Description="Package Specification", ComponentLink3URL=http://www.fairchildsemi.com/dwg/MA/MA03D.pdf, DatasheetVersion="Rev. 1.1.0, 10/2014", ESR="40 Ohm", Height="0.041 inch", Length="0.197 inch", Mount="Surface Mount", PackageDescription="3-Pin Small Outline Transistor, Body 2.92 x 1.325 mm, Pitch 0.95 mm", PackageReference=SOT23-3, Packaging="Tape and Reel", Pins=4, REACH SVHC="No SVHC", RoHSCompliant=True, Supplier 1=Digi-Key, Tolerance=30ppm, Width="0.126 inch"
R1 R2 R3 R4 R11 R12 R34: library part Res1, "Resistor", Supplier Part Number 1=CR0603-J/-000ELFDKR-ND, LatestRevisionDate=17-Jul-2002, LatestRevisionNote="Re-released for DXP Platform.", PackageDescription="Axial Device, Thru-Hole; 2 Leads; 0.3 in Pin Spacing", PackageReference=AXIAL-0.3, Published=8-Jun-2000, Publisher="Altium Limited", Supplier 1=Digi-Key
R5 R13 R14 R16 R17 R18 R19 R20 R21 R23 R25 R26 R27 R28 R29 R30: library part Res1, "Resistor", Supplier Part Number 1=2019-RK73H1JTTD1002FCT-ND, LatestRevisionDate=17-Jul-2002, LatestRevisionNote="Re-released for DXP Platform.", PackageDescription="Axial Device, Thru-Hole; 2 Leads; 0.3 in Pin Spacing", PackageReference=AXIAL-0.3, Published=8-Jun-2000, Publisher="Altium Limited", Supplier 1=Digi-Key
R6 R7: library part Res1, "Resistor", Supplier Part Number 1=541-750HCT-ND, LatestRevisionDate=17-Jul-2002, LatestRevisionNote="Re-released for DXP Platform.", PackageDescription="Axial Device, Thru-Hole; 2 Leads; 0.3 in Pin Spacing", PackageReference=AXIAL-0.3, Published=8-Jun-2000, Publisher="Altium Limited", Supplier 1=Digi-Key
R15 R24: library part Res1, "Resistor", Supplier Part Number 1=RMCF0603FT51K0CT-ND, LatestRevisionDate=17-Jul-2002, LatestRevisionNote="Re-released for DXP Platform.", PackageDescription="Axial Device, Thru-Hole; 2 Leads; 0.3 in Pin Spacing", PackageReference=AXIAL-0.3, Published=8-Jun-2000, Publisher="Altium Limited", Supplier 1=Digi-Key
R22 R31: library part Res1, "Resistor", Supplier Part Number 1=RMCF0603FT12K0CT-ND, LatestRevisionDate=17-Jul-2002, LatestRevisionNote="Re-released for DXP Platform.", PackageDescription="Axial Device, Thru-Hole; 2 Leads; 0.3 in Pin Spacing", PackageReference=AXIAL-0.3, Published=8-Jun-2000, Publisher="Altium Limited", Supplier 1=Digi-Key
R32 R35 R36: library part Res1, "Resistor", Supplier Part Number 1=RMCF0603FT1K00CT-ND, LatestRevisionDate=17-Jul-2002, LatestRevisionNote="Re-released for DXP Platform.", PackageDescription="Axial Device, Thru-Hole; 2 Leads; 0.3 in Pin Spacing", PackageReference=AXIAL-0.3, Published=8-Jun-2000, Publisher="Altium Limited", Supplier 1=Digi-Key
R33: library part Res1, "Resistor", Supplier Part Number 1=RMCF0603FT330RCT-ND, LatestRevisionDate=17-Jul-2002, LatestRevisionNote="Re-released for DXP Platform.", PackageDescription="Axial Device, Thru-Hole; 2 Leads; 0.3 in Pin Spacing", PackageReference=AXIAL-0.3, Published=8-Jun-2000, Publisher="Altium Limited", Supplier 1=Digi-Key
Rsense1 Rsense2: library part CMP-1018-00955-1, "8M66 1W 1% 2512 (6432 Metric)  SMD", Case-EIA=2512, Case-Metric=6432, Power="1 W", Supplier Part Number 1=YAG2162CT-ND, Tolerance="1 %", Supplier 1=Digi-Key, Technology=SMT
S1 S2: "Switch", Supplier Part Number 1=CKN10838CT-ND, LatestRevisionDate=17-Jul-2002, LatestRevisionNote="Re-released for DXP Platform.", PackageDescription="Switch; 2 Leads", PackageReference=SPST-2, Published=24-Mar-1999, Publisher="Altium Limited", Supplier 1=Digi-Key
U1: "ARM Cortex-M4 32-bit MCU+FPU, 512 KB Flash, 96 KB Internal RAM, 50 I/Os, 64-Pin LQFP, -40 to 85 degC, Tray", I/Os (High Current)=50, Operating Frequency(F) (Processor speed) (MHz)=84, Package Description=LQFP64, Package Reference="64-Pin Low-profile Quad Flat Package, Body 10 x 10 mm, Pitch 0.5 mm", Supplier Part Number 1=497-17429-ND, Supply Voltage(Vcc) min (V)=1.7, ComponentLink1Description="Manufacturer URL", ComponentLink1URL=http://www.st.com/, ComponentLink2Description=Datasheet, ComponentLink2URL=http://www.st.com/st-web-ui/static/active/en/resource/technical/document/datasheet/DM00102166.pdf, Core="ARM Cortex-M4", DatasheetVersion="Rev. 3", FLASH Size (Prog) (kB)=512, Internal RAM Size (kB)=96, Mounting Technology="Surface Mount", Packing=Tray, Supplier 1=Digi-Key
U2: "500mA Low-IQ Small-Size Low-Dropout _LDO_ Regulator 5-SOT-23 -40 to 125", Package="SOT-23 Texas Instruments", Supplier Part Number 1=296-50411-1-ND, Availability=Unavailable, MF="Texas Instruments", MP=TLV75533PDBVR, Price=None, SnapEDA_Link=https://www.snapeda.com/parts/TLV75533PDBVR/Texas%20Instruments/view-part/?ref=snap, Supplier 1=Digi-Key
U3: library part CMP-0394-00928-2, "Single Output LDO, 200 mA, Fixed 1.8 V Output, 2 to 5.5 V Input, with Low IQ, 5-pin SC70 (DCK), -40 to 125 degC, Green (RoHS & no Sb/Br)", Manufacturer="Texas Instruments", Supplier Part Number 1=296-32409-1-ND, Accuracy(%)=2, Code_JEDEC=MO-203, ComponentLink1Description="Manufacturer URL", ComponentLink1URL=http://www.ti.com/, ComponentLink2Description=Datasheet, ComponentLink2URL=http://www.ti.com/general/docs/lit/getliterature.tsp?genericPartNumber=TLV70018&fileType=pdf, ComponentLink3Description="Package Specification", ComponentLink3URL=http://www.ti.com/litv/pdf/mpds025f, DatasheetVersion=SLVSA00D, Eco-Plan="Green (RoHS & no Sb/Br)", Fixed Output Options(V)=1.8, Iout(Max)(A)=0.2, Iq(Typ)(mA)=0.03, Mounting Technology="Surface Mount", PackageDescription="5-Pin Plastic Small-Outline, Body 2 x 1.25 mm, Pitch 0.65 mm", PackageReference=DCK0005A, PackageVersion=4093553-3/G, PartNumber=TLV70018DCKR, SubFamily="Single Channel LDO", Supplier 1=Digi-Key, Vdo(Typ)(mV)=175, Vin(Max)(V)=5.5, Vin(Min)(V)=2, Vout Adj(Max)(V)=1.8, Vout Adj(Min)(V)=1.8
U6 U7 U8: library part CMP-0859-00011-4, "Dual-Bit Dual Supply Transceiver with Configurable Voltage Translation and 3-State Outputs, DCU0008A, LARGE T&R", F @ Nom Voltage(Max)(Mhz)=150, Generic Part Number=SN74LVC2T45, ICC @ Nom Voltage(Max)(mA)=0.004, Manufacturer="Texas Instruments", Operating Temperature Range(C)="-40 to 85", Rating=Military, Supplier Part Number 1=296-16845-1-ND, tpd @ Nom Voltage(Max)(ns)=17.7,10.3,8.3,7.2, Voltage(Nom)(V)=1.8,2.5,3.3,5, 3-State Output=Yes, Bits(#)=2, DatasheetVersion=SCES516J, Input Type=CMOS/TTL, Logic=True, Output Drive (IOL/IOH)(Max)(mA)=32/-32, Output Type=CMOS, PackageReference=DCU0008A, Schmitt Trigger=No, Sub-Family="Dual Supply Translator", Supplier 1=Digi-Key, Technology Family=LVC, VCC(Max)(V)=5.5, VCC(Min)(V)=1.65
U9: library part CMP-0248-00024-2, "USB to Full-Handshake UART Interface Chip, UHCI/OHCI/EHCI Compatible, USB 2.0 Compatible, -40 to +85 degC, 20-Pin SSOP, Pb-Free, Tape and Reel", Manufacturer=FTDI, Supplier Part Number 1=768-1129-1-ND, Code_JEDEC=MO-137-AD, ComponentLink1Description="Manufacturer URL", ComponentLink1URL=http://www.ftdichip.com/, ComponentLink2Description=Datasheet, ComponentLink2URL=http://www.ftdichip.com/Support/Documents/DataSheets/ICs/DS_FT231X.pdf, ComponentLink3Description="FT231X Product Page", ComponentLink3URL=www.ftdichip.com/Products/ICs/FT231X.html, DatasheetVersion="ver 1.2, Feb-2013", PackageDescription="20-Pin Small Outline Package, 8.6 x 3.9 mm Body, 0.635 mm Pitch", PackageReference=SSOP-20, PackageVersion=Feb-13, PartNumber=FT231XS-R, RevisionNote="DatasheetVersion updated to 1.2 Feb-2013", Supplier 1=Digi-Key
Y1: "Crystal or Oscillator", Manufacturer_Name=ABRACON, Mouser Part Number=815-ASEMB-8-XY-T, Supplier Part Number 1=DSC1001CL5-008.0000TCT-ND, Datasheet Link=https://abracon.com/Oscillators/ASEMB.pdf, Manufacturer_Part_Number=ASEMB-8.000MHZ-XY-T, Mouser Price/Stock=https://www.mouser.com/Search/Refine.aspx?Keyword=815-ASEMB-8-XY-T, Supplier 1=Digi-Key

## Via types
v1: diameter 25.5, hole 13.5, Top Layer to Bottom Layer, 76 vias
v2: diameter 25.5, hole 13.5, Top Layer to Bottom Layer, tented both sides, 54 vias
v3: diameter 27.56, hole 11.81, Top Layer to Bottom Layer, 9 vias

## Nets (pads, with @x,y where several pads share a name; then routed paths per layer and width w, separated by ;. In a path a pad name is that pad's centre, name@x,y a point inside that pad or via, vN(x,y) a via of type N, cw(c..) or ccw(c..) an arc to the next point about the centre after c; other vN are vias at no path point)
1.8V: C17.2 IMU.8 U3.5 U6.1 U7.1 U8.8 | length 1197.3
  Top Layer w6: U3.5@3358.58,1760.59 3389.02,1760.59 3409.45,1740.16 3409.45,1673.23 ; U7.1@3393.7,1433.07 3393.7,1401.57 v1@3409.45,1385.83 ; U8.8@3401.57,1629.92 3403.23,1629.92 3405.74,1632.43 3405.74,1634.09 3409.45,1637.8 3409.45,1673.23 ; U6.1@3414.09,1270.35 3414.09,1270.44 3414.32,1270.67 3455.71,1270.67 v1(3456.69,1271.65) ; v1(3437.01,1669.29) 3433.07,1673.23 3409.45,1673.23 ; IMU.8@3622.05,1464.57 3649.61,1464.57 3661.42,1452.76 3685.04,1452.76 3691.04,1446.75 3706.79,1446.75 3712.6,1440.94 C17.2@3712.6,1354.33 ; C17.2@3716.54,1348.43 C17.2@3720.47,1348.43 ; C17.2@3720.47,1352.36 C17.2@3728.35,1352.36
  Bottom Layer w6: v1@3413.39,1389.76 3414.32,1389.76 3415.45,1390.9 3415.45,1403.64 3425.2,1413.39 3437.01,1413.39 ; v1(3437.01,1669.29) 3437.01,1448.82 ; v1(3685.04,1448.82) 3437.01,1448.82 ; 3437.01,1413.39 3437.01,1448.82 ; 3437.01,1413.39 3437.01,1405.51 3452.76,1389.76 v1@3452.76,1279.53 ; v1@3452.76,1279.53 3452.76,1275.59 3456.69,1275.59 v1@3452.76,1279.53
  other v1: 3413.39,1381.89
3.3V: C2.1 C3.2 C9.1 C10.1 C11.1 C12.1 C13.1 C14.2 C15.1 C16.1 C18.1 C19.1 C20.1 C21.2 FLASH.8 IMU.13 P1.1 P6.2 PRES.1 PRES.10 R6.2 R13.2 R14.2 R15.2 R16.2 R23.2 R24.2 R25.2 R34.2 U1.1 U1.13 U1.19 U1.32 U1.48 U1.64 U2.5 U3.1 U3.3 U6.8 U7.8 U8.1 Y1.4 | length 11254
  Top Layer w6: U2.5@1303.15,2622.05 1303.15,2588.58 1305.12,2590.55 ; C14.2@1436.29,2561.39 C14.2@1436.29,2563.71 ; C2.1@1474.95,2472.44 1474.95,2422.69 1503.94,2393.7 1531.5,2393.7 1555.12,2370.08 1559.06,2370.08 R15.2@1670.08,2370.08 ; R15.2@1675,2369.45 1815.55,2369.45 R14.2@1820,2365 ; R14.2@1826.77,2366.14 1826.77,2370.63 R14.2@1834.65,2378.51 ; FLASH.8@2397.64,2190.6 2403.89,2196.85 FLASH.8@2409.45,2196.85 ; C16.1@2464.57,1814.96 2464.57,1816.53 C16.1@2464.57,1817.91 ; C20.1@2525,705 2525,740 2549.68,764.69 PRES.10@2549.68,789.88 ; PRES.1@2560.12,810.16 2561.28,808.99 2576.01,808.99 2585,800 2585,775 2615,745 C19.1@2615,710 ; U1.48@2751.86,1273.34 U1.48@2752.64,1272.56 ; U1.1@2752.64,1717.44 2752.64,1877.64 Y1.4@2755,1880 ; Y1.4@2756.34,1882.6 R34.2@2837.4,1882.6 ; C9.1@2826.54,1195 2829.49,1195 2847.16,1177.33 2847.16,1157.84 3250,755 3250,680 3500.87,429.13 3637.8,429.13 P1.1@3645.67,421.26 ; U1.64@2827.44,1642.64 2847.64,1642.64 2955,1750 2995,1750 C10.1@3000,1745 ; R34.2@2840,1885.04 2920.47,1885.04 C3.2@2921.26,1885.83 ; C3.2@2933.07,1883.86 3017.72,1883.86 3021.65,1887.8 R13.2@3023.62,1889.76 ; C10.1@2990,1730.51 C10.1@2990,1745 ; C10.1@3005,1748.46 C13.1@3095,1748.46 3106.38,1759.84 3164.84,1759.84 3165,1760 3165,1759.84 ; R13.2@3025.59,1887.79 3023.62,1885.83 R13.2@3023.62,1882.87 3107.28,1882.87 3133.86,1909.45 P6.2@3133.86,2043.31 ; v1(3165,1675) 3165,1675.76 3165.35,1676.11 3165.35,1690.35 3180,1705 ; v1(3210,1435) 3210.24,1435.24 3264.76,1435.24 U7.8@3265,1435 ; v1(3216.54,1267.72) 3217.52,1268.7 3263.07,1268.7 U6.8@3263.58,1269.21 ; U8.1@3255,1630 3254.53,1629.53 3220.47,1629.53 3200,1650 3200,1685 3180.28,1704.72 ; U3.3@3255.91,1712.6 3251.97,1708.66 3200.79,1708.66 3185.04,1724.41 3185.04,1759.84 ; U3.3@3259.72,1704.72 U3.3@3260,1705 ; U3.1@3260,1760 3259.84,1759.84 3185.04,1759.84 ; U3.3@3268.02,1707.43 U3.3@3270,1709.41 ; U3.1@3270,1760.59 3270,1781.81 3291.34,1803.15 3393.7,1803.15 3488.19,1708.66 C21.2@3527.56,1708.66 ; C21.2@3527.56,1706.69 3568.9,1706.69 3582.68,1692.91 3582.68,1645.8 3594.55,1633.92 3614.17,1614.3 3659.2,1614.3 3659.45,1614.05 3728.47,1614.05 C18.1@3732.28,1610.24 ; C21.2@3543.31,1699.75 C21.2@3543.31,1700.79 ; 3594.49,1633.86 3578.74,1618.11 3578.74,1590.55 3599.05,1570.24 3599.05,1559.92 3599.11,1559.87 IMU.13@3599.41,1559.87 ; P1.1@3628.47,451.53 P1.1@3655,425 ; C18.1@3732.28,1613.19 C18.1@3732.28,1610.24 ; C18.1@3736.22,1606.3 C18.1@3732.28,1610.24 ; 3165,1759.84 3185.04,1759.84 ; 3165,1759.84 3165,1720 3180,1705 ; 3180,1705 3180.28,1704.72 ; 3180,1705 3180,1704.72 3180.28,1704.72
  Top Layer w8: R15.2@1670.08,2370.08 1675,2375 R15.2@1675,2369.45
  Top Layer w10: R25.2@1650,810 1650,775 1675,750 R24.2@1675,459.45 R23.2@1770,459.45 ; R23.2@1770,462.4 1772.6,465 2235,465 2470,700 ; C11.1@2280,1325 2320,1325 2342.02,1347.02 U1.32@2368.36,1347.02 ; C12.1@2285,1605 2286.73,1603.27 2330,1603.27 U1.19@2382.56,1603.27 2448.66,1603.27 ; FLASH.8@2397.64,2190.6 2397.64,1884.84 C16.1@2464.57,1817.91 ; C16.1@2460,1816.53 2464.57,1816.53 2543.47,1816.53 C15.1@2545,1815 ; U1.13@2516.07,1703.87 2516.07,1696.13 2517,1695.2 2517,1689 2448.66,1620.66 2448.66,1603.27 ; U1.13@2516.42,1717.44 2516.42,1785 2530,1798.58 C15.1@2530,1800 ; C20.1@2520,695 2515,700 2470,700 ; C20.1@2520,698.47 2611.53,698.47 C19.1@2615,695 ; 2565.76,1485.76 2427.36,1347.36 U1.32@2382.56,1347.36 2368.71,1347.36 U1.32@2368.36,1347.02 ; 2591.22,1462.52 2771.34,1642.64 U1.64@2827.44,1642.64 ; U1.48@2751.86,1273.34 2752.29,1273.77 2752.29,1299.86 2671.42,1380.74 2671.19,1380.74 2590.32,1461.62 2565.97,1485.97 2448.66,1603.27 ; U1.48@2752.64,1272.56 2752.64,1258.71 2753.48,1257.87 2797.13,1257.87 2830,1225 C9.1@2830,1200 ; U1.1@2752.64,1717.44 2752.64,1660.35 2770.35,1642.64 ; C9.1@2817.64,1190.83 C9.1@2820,1188.46 ; U1.32@2368.36,1347.02 2367.87,1346.53 2367.87,1267.87 2350,1250 2350,815 2465,700 2470,700
  Top Layer w12: U2.5@1305.12,2635.63 1305.12,2623.43 U2.5@1310.73,2617.81 ; R16.2@1696.85,1861.22 1696.85,1866.14 R16.2@1696.85,1869.09 ; v2(2090.42,1737.9) 2090.42,1714.58 2090.55,1714.45 2094.49,1710.51
  Top Layer w20: R6.2@1251.97,2519.68 1251.97,2559.06 1263.78,2570.87 1305.12,2570.87 ; U2.5@1305.12,2623.43 1305.12,2590.55 1305.12,2570.87 ; C14.2@1444.88,2566.93 1440.94,2570.87 1305.12,2570.87 ; C2.1@1460.63,2472.44 1305.12,2472.44 ; R16.2@1696.85,1850.39 1700.79,1850.39 1706.69,1856.3 1696.85,1866.14 1366.14,2196.85 1366.14,2379.63 1305.12,2440.65 1305.12,2472.44 ; R16.2@1712.6,1854.33 1712.6,1859.25 1713.58,1858.27 2026.73,1858.27 2090.55,1794.45 2090.55,1714.45 ; 1305.12,2472.44 1305.12,2570.87
  Bottom Layer w6: v1(3165,1675) 3165,1435 ; v1@3208.66,1271.65 3165,1315.31 3165,1435 ; v1@3215,1435 v1(3210,1435) 3165,1435
  Bottom Layer w12: v2(2090.42,1737.9) 2090.42,1714.57 2092.4,1712.6
  Bottom Layer w20: 2092.4,1712.6 2199.99,1605 v2(2330,1605)
+5: C22.1 C23.1 D4.1 J1.1 R35.2 R36.2 U9.15 | length 1442.2
  Top Layer w6: J1.1@1984.25,2734.25 J1.1@1984.25,2751.97 ; R35.2@2303.15,2564.96 2303.15,2567.91 R35.2@2319.83,2584.6 ; U9.15@2728.35,2645.67 2727.66,2646.36 U9.15@2758.86,2646.36
  Top Layer w10: R36.2@2448.82,2562.99 2514.42,2562.99 2597.78,2646.36 U9.15@2727.66,2646.36
  Top Layer w20: D4.1@1581.2,2673.23 1581.2,2667.22 D4.1@1585.28,2663.15 ; D4.1@1582.68,2669.29 1602.36,2649.61 1964.57,2649.61 1984.25,2669.29 ; J1.1@1984.25,2734.25 1984.25,2669.29 ; C22.1@1992.13,2578.74 2019.68,2606.3 2031.5,2606.3 ; 2027.56,2653.54 2011.81,2669.29 1984.25,2669.29 ; 2031.5,2649.61 2031.5,2606.3 ; C23.1@2106.3,2566.93 2066.93,2606.3 2031.5,2606.3 ; C23.1@2118.11,2553.15 2120.57,2555.61 2295.77,2555.61 R35.2@2303.15,2562.99 ; R35.2@2303.15,2558.07 2308.07,2562.99 2429.13,2562.99 R36.2@2433.07,2566.93